# Altium PCB PCB_Ticketing_Slave.PcbDoc
Units mm, origin at the board's own origin, x right, y up, seen from the top; angles counter-clockwise.
Board outline 80.7 x 51.5 mm, 2 copper layers (Top Layer, Bottom Layer), stack 1.586 mm thick; 48 components, 35 nets, 188 pads, 69 vias.
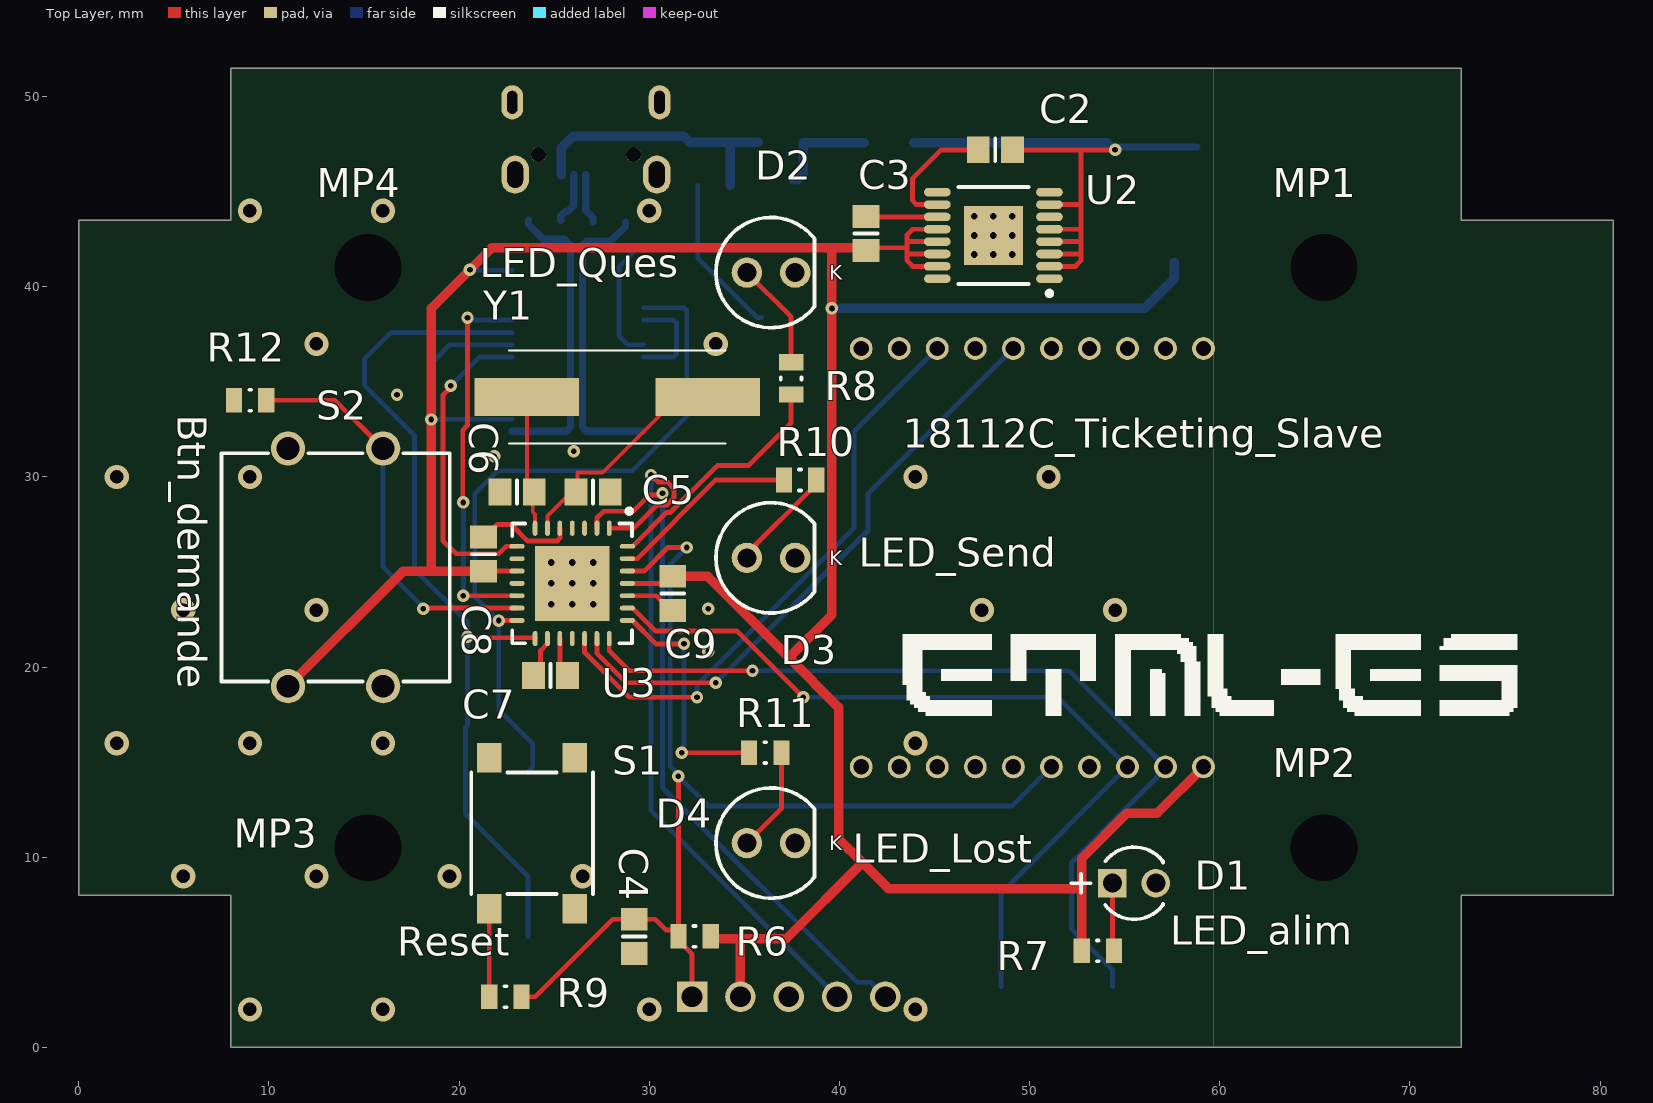
[diagram p0: Top Layer view]
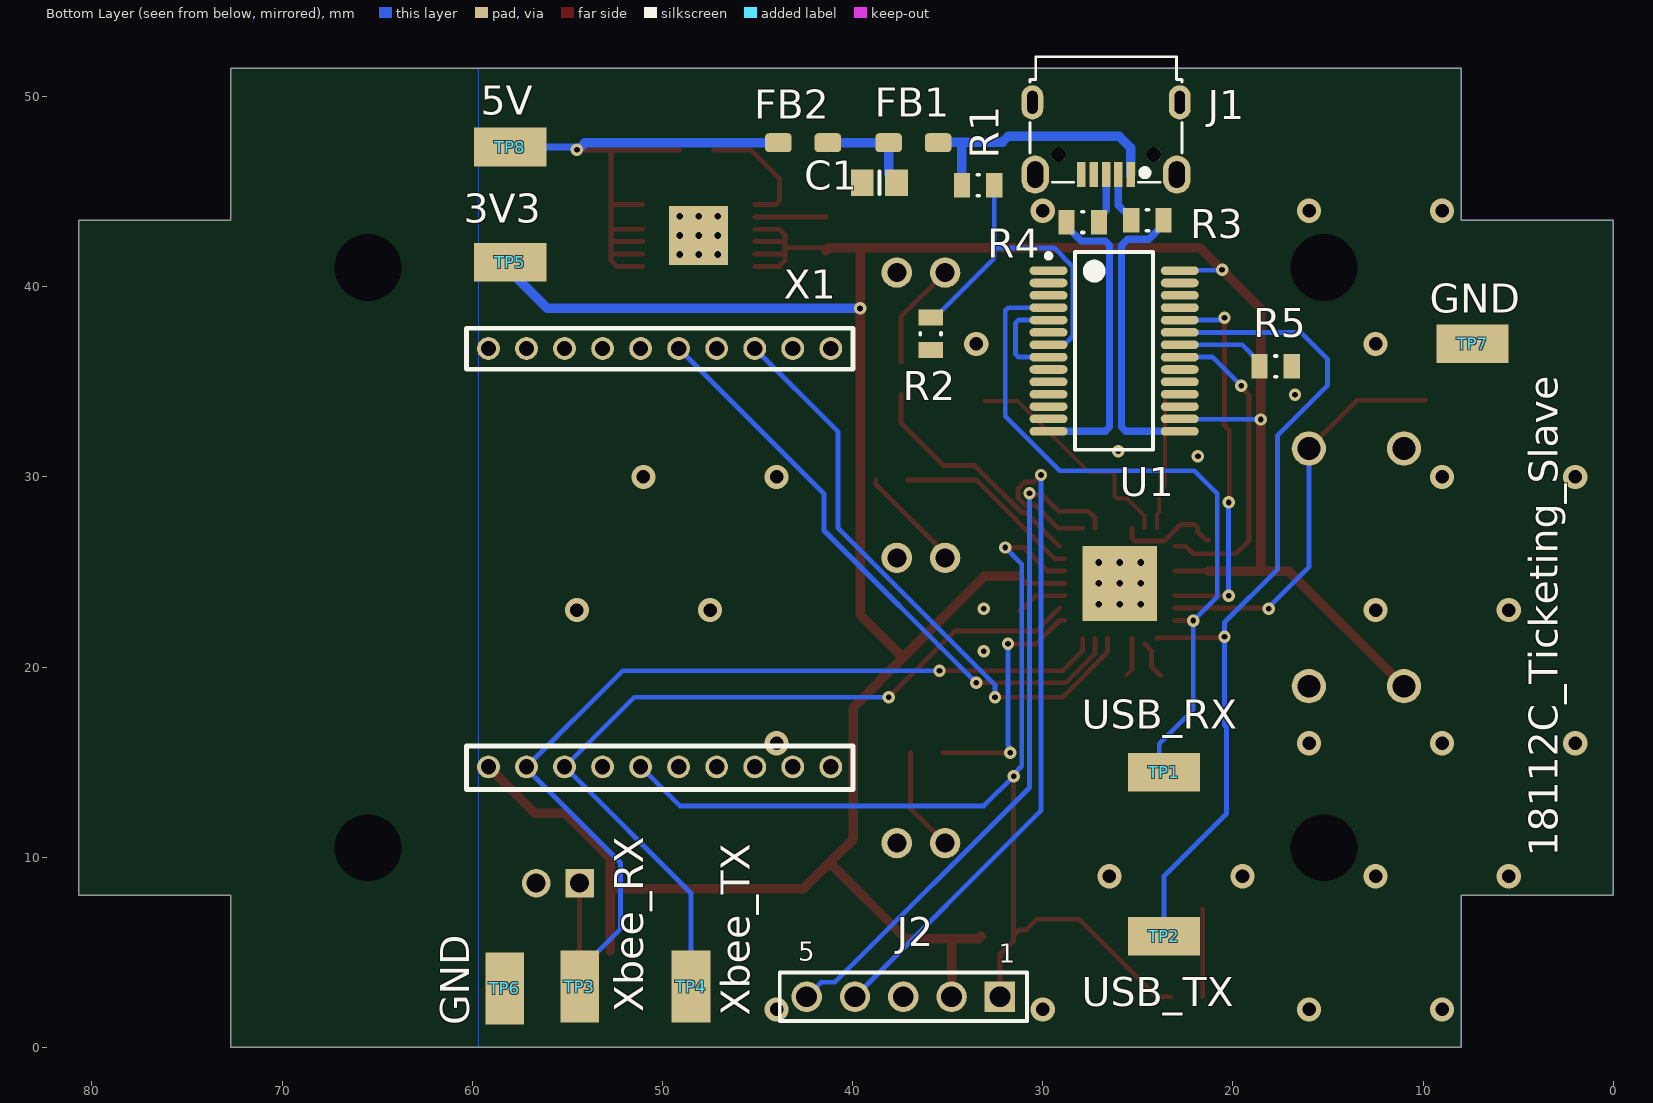
[diagram p1: Bottom Layer view, seen from below]
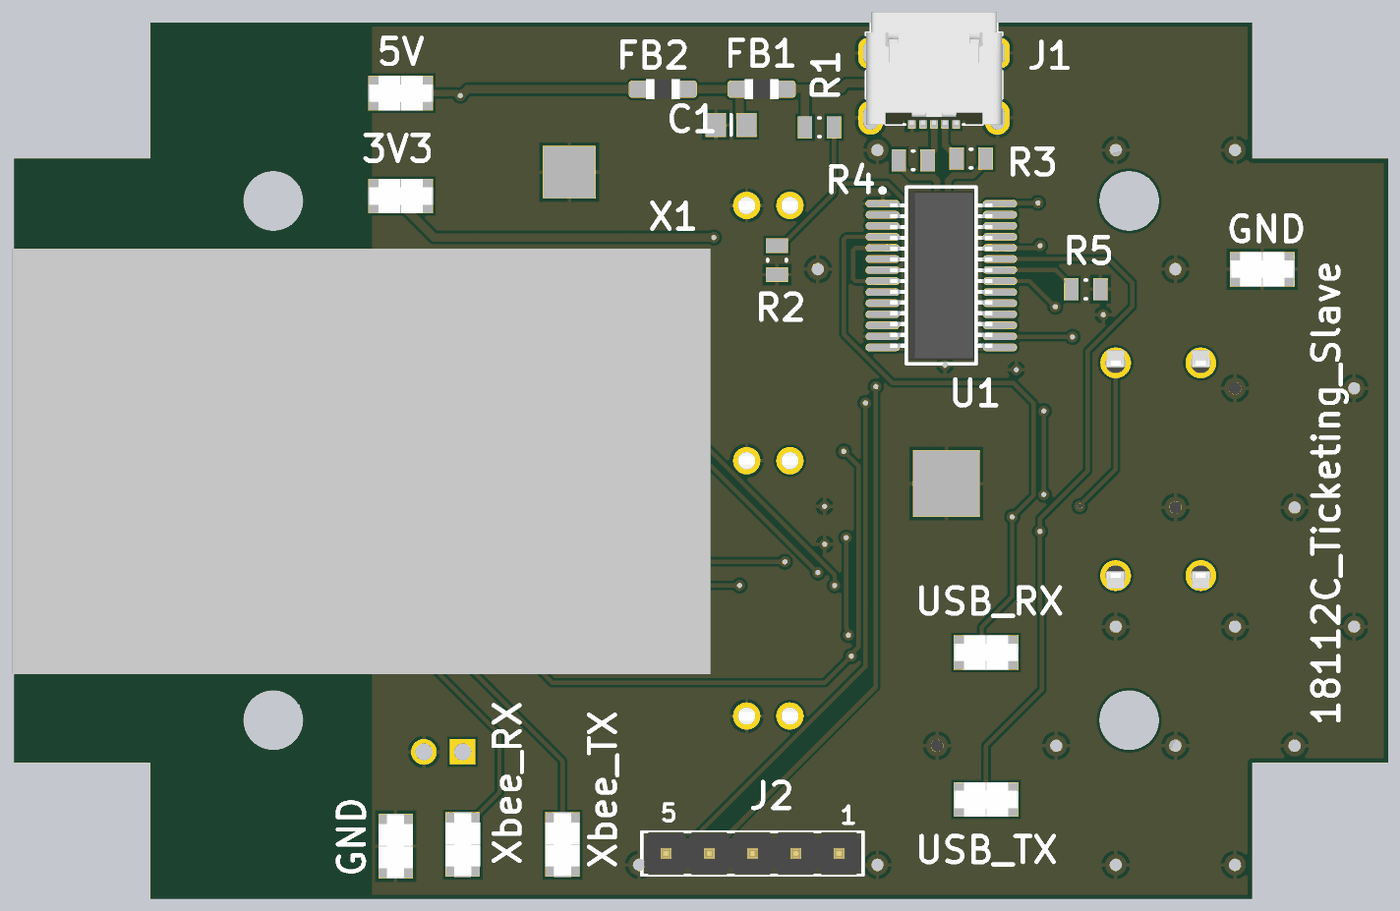
[diagram p2: 3D render of the assembled board from below, using the file's embedded part models]

## Layer stack, top to bottom
Top Solder: solder mask 0.0102, Solder Resist, Dk 3.5
Top Layer: signal copper 0.018
Dielectric1: core 1.55, FR-4, Dk 4.8
Bottom Layer: signal copper 0.018
Bottom Solder: solder mask 0.0102, Solder Resist, Dk 3.5

## Board outline
0,8 0,43.5 8,43.5 8,51.5 72.7,51.5 72.7,43.5 80.7,43.5 80.7,8 72.7,8 72.7,0 8,0 8,8

## Design rules (kind name [scope] priority, off if disabled: settings)
BoardOutlineClearance [All] p1: gap=0.25 ignorepadtopadclearanceinfootprint=FALSE except(0: Arc-SplitContinuation Track-SplitContinuation SMDPad-SplitContinuation THPad-SplitContinuation Via-SplitContinuation Fill-SplitContinuation Poly-SplitContinuation Region-SplitContinuation Text-SplitContinuation)
Clearance Clearance-xPP-xTP-xTT [All] p1: gap=0.15 ignorepadtopadclearanceinfootprint=FALSE except(0: Arc-Hole Track-Hole SMDPad-Hole THPad-Hole Via-Hole Fill-Hole Poly-Hole Region-Hole Text-Hole)
ComponentClearance [All] p1: gap=0.25 collisioncheckmode=3 verticalgap=0.25 showdistances=FALSE
DiffPairsRouting [All] p1: maxlimit=0.25 minlimit=0.25 mostfreqgap=0.25 toplayer_minwidth=0.381 toplayer_maxwidth=0.381 toplayer_prefwidth=0.381 bottomlayer_minwidth=0.381 bottomlayer_maxwidth=0.381 bottomlayer_prefwidth=0.381 maxuncoupledlength=12.5
Height [All] p1: minheight=0 maxheight=25 prefheight=12.5
HoleSize HoleSize-PTH [All] p1: absolutevalues=TRUE maxlimit=10 minlimit=0.25 maxpercent=80.000 minpercent=20.000
HoleToHoleClearance [All] p1: gap=0.35 allowstackedmicrovias=TRUE
MinimumAnnularRing "Minimum IAR  >0.45mm" [((ObjectKind = 'Pad') OR (ObjectKind = 'Via')) And (Layer = 'MultiLayer') And (HoleDiameter > AsMM(0.45))] p1: minimumring=0.175 // minimum inner annular ring for pads > 0.45mm finished hole size
MinimumAnnularRing "Minimum IAR <=0.45mm" [((ObjectKind = 'Pad') OR (ObjectKind = 'Via')) And (Layer = 'MultiLayer') And (HoleDiameter <= AsMM(0.45))] p2: minimumring=0.175 // minimum inner annular ring for pads <= 0.45mm finished hole size
MinimumSolderMaskSliver [All] p1: minsoldermaskwidth=0.08
PasteMaskExpansion [All] p1: expansion=-0.025
PlaneClearance PlaneClearance-IPI [All] p1: clearance=0.25
PlaneConnect [All] p1: planeconnectstyle=Relief reliefexpansion=0.175 reliefentries=4 reliefconductorwidth=0.2 reliefairgap=0.2
PolygonConnect PolygonConnect-xTW [All] p1: connectstyle=Relief reliefconductorwidth=0.2 reliefentries=4 polygonreliefangle="90 Angle" airgapwidth=0.2
RoutingCorners [All] p1: cornerstyle=45-Degree minsetback=2.5 maxsetback=2.5
RoutingVias RoutingViasES [All] p1: holewidth=0.3 width=0.65 viastyle="Through Hole" minholewidth=0.25 minwidth=0.61 maxholewidth=0.45 maxwidth=0.8 // finishet hole size <= 0.45mm
SilkToSilkClearance [All] p1: silktosilkclearance=0.2
SilkToSolderMaskClearance SilkscreenOverComponentPads [IsPad] p1: minsilkscreentomaskgap=0.2 clearancetoexposedcopper=TRUE
SolderMaskExpansion [All] p1: expansion=0 istentingtop=FALSE
UnRoutedNet [All] p1: checkbadconnections=TRUE
Width "Width Power" [InNetClass('POWER')] p1: maxlimit=0.5 minlimit=0.254 preferedwidth=0.5
Width Width-xTW [All] p2: maxlimit=1.5 minlimit=0.15 preferedwidth=0.254
17 further rules are at their usual default settings.

## Classes and differential pairs
net class POWER: 3V3 5V GND NetC1_1 NetR1_2 NetU2_6 VBUS
component class Designator: D1 D2 D3 D4 MP1 MP2 MP3 MP4 R7 R8 R9 R10 R11 R12 S1 S2
differential pair USB_D: +USB_D_P -USB_D_N
differential pair U_D: +U_D_P -U_D_N

## Components (designator, comment, footprint, x,y, rotation, side; value= is the part's Value field where it differs from the comment)
C1 "680nF" 6-0805_N 38.596,45.475 r0 bottom
C2 "10uF" 6-0805_N 48.2,47.2 r180 top
C3 "10uF" 6-0805_N 41.402,42.802 r270 top
C4 "120nF" 6-0805_N 29.21,5.842 r90 top
C5 "22pF" 6-0805_N 27.052,29.21 r180 top
C6 "22pF" 6-0805_N 23.052,29.21 r0 top
C7 "10uF" 6-0805_N 24.811,19.558 r0 top
C8 "100nF" 6-0805_N 21.285,25.937 r270 top
C9 "100nF" 6-0805_N 31.242,23.876 r90 top
D1 "WP424IDT" LED-2P-2.28-3MM 55.499,8.636 r0 top
D2 "WP7113LGD" "Type 5mm" 36.41,40.746 r0 top locked
D3 "WP7113ND" "Type 5mm" 36.41,25.746 r0 top locked
D4 "WP7113LID" "Type 5mm" 36.41,10.746 r0 top locked
FB1 "600Ohm, 2A" "WE-CBF_0805_High Current" 36.805,47.575 r0 bottom
FB2 "600Ohm, 2A" "WE-CBF_0805_High Current" 42.605,47.575 r0 bottom
J1 "629105150521" 629105150521 26.675,48.8 r0 bottom
J2 "2.54 mm_THT_Vertical_5 pin" 61300511121 37.338,2.667 r0 bottom
MP1 "M3" 9774010151 65.485,41.01 r0 top
MP2 "M3" 9774010151 65.485,10.5 r0 top
MP3 "M3" 9774010151 15.215,10.5 r0 top
MP4 "M3" 9774010151 15.215,41.01 r0 top
R1 "10k" RESC0805(2012)_L 33.401,45.339 r180 bottom
R2 "20k" RESC0805(2012)_L 35.9,37.527 r270 bottom
R3 "24R" RESC0805(2012)_L 24.5,43.5 r180 bottom
R4 "24R" RESC0805(2012)_L 27.9,43.4 r0 bottom
R5 "1k" RESC0805(2012)_L 17.757,35.814 r180 bottom
R6 "47k" RESC0805(2012)_L 32.385,5.842 r180 top
R7 "68" RESC0805(2012)_L 53.594,5.08 r180 top
R8 "75" RESC0805(2012)_L 37.465,35.179 r270 top
R9 "120" RESC0805(2012)_L 22.44,2.667 r0 top value=10k
R10 "68" RESC0805(2012)_L 37.934,29.845 r180 top value=680
R11 "820" RESC0805(2012)_L 36.1,15.5 r180 top value=680
R12 "10k" RESC0805(2012)_L 9.017,34.036 r180 top
S1 "430182050816" 430182050816 23.84,11.265 r270 top
S2 "430466073726" 4304x60737x6_12x12x7.3 13.51,25.246 r90 top locked
TP1 "" KSTN-5019_V 23.622,14.478 r180 bottom
TP2 "" KSTN-5019_V 23.622,5.842 r180 bottom
TP3 "" KSTN-5019_V 54.359,3.2 r270 bottom value=Xbee_RX
TP4 "" KSTN-5019_V 48.5,3.2 r270 bottom value=Xbee_TX
TP5 "" KSTN-5019_V 58,41.3 r0 bottom
TP6 "" KSTN-5019_V 58.3,3.1 r270 bottom
TP7 "" KSTN-5019_V 7.4,37 r0 bottom
TP8 "" KSTN-5019_V 58,47.35 r0 bottom
U1 "CY7C64225-28PVXC" CYP-PVX28_N 26.25,36.625 r180 bottom
U2 "MAX1793EUE33+" TSOP65P640X110_HS-17N 48.1,42.7 r180 top
U3 "PIC32MX130F064B-I/ML" MCHP-QFN-ML28_L 25.952,24.402 r270 top
X1 "Header 2x10" ZB-SB 50.15,25.755 r90 bottom locked
Y1 "LFXTAL003151" LFXTAL003151REEL 28.321,34.2 r180 top

## Footprints (in the part's own frame and the unit in brackets; to place one, negate y for a bottom-side part, rotate by r counter-clockwise, add the part's x,y. Pads: shape width x height; smd on the part's side, far side on the other; paste and mask are expansions set on the pad)
6-0805_N [mm] "Chip Resistor, Body 2.0x1.2mm, IPC Medium Density"
  rect 1.2x1.4 smd: 1(-0.9,0) 2(0.9,0)
  silkscreen extent 0,-0.6 0,0.6, body extent -1.07,-0.7 1.07,0.7, height 0.7
4304x60737x6_12x12x7.3 [mm] "12x12mm washable Tact Switch, THT version"
  round 1.8 hole 1.2: 1(-6.25,2.5) 2(6.25,2.5) 3(-6.25,-2.5) 4(6.25,-2.5)
  silkscreen extent -6,-6 6,6, body extent -6.99,-6 6.99,6, height 7.35
9774010151 [mm] "M2.5 Thread Internal, Length 1mm"
  round 0 hole 3.51 unplated paste-403.566: 1(0,0)
61300511121 [mm] "Pin Header, pitch 2.54 mm, THT, Vertical, single row, 5p"
  rect 1.6x1.6 hole 1.1: 1(-5.08,0)
  round 1.6 hole 1.1: 2(-2.54,0) 3(0,0) 4(2.54,0) 5(5.08,0)
  silkscreen extent -6.5,-1.27 6.5,1.27, body extent -6.35,-1.27 6.35,1.27, height 8.57
430182050816 [mm] "SMD Tact Switch, body 6x6mm"
  rect 1.55x1.3 smd: 1(-3.975,2.25) 2(-3.975,-2.25) 3(3.975,2.25) 4(3.975,-2.25)
  silkscreen extent -3.2,-3.2 3.2,3.2, body extent -4.5,-3.1 4.5,3.1, height 5.03
629105150521 [mm] "Micro USB 2.0 SMT Type B Horizontal 5 Contacts High Current"
  rect 0.45x1.3 smd: 1(-1.3,2.9) 2(-0.65,2.9) 3(0,2.9) 4(0.65,2.9) 5(1.3,2.9)
  oval 1.15x1.8 hole 0.55 slot 1.2 at 90 deg: Shell(-3.875,-0.9) Shell(3.875,-0.9)
  oval 1.45x2 hole 0.85 slot 1.4 at 90 deg: Shell(-3.725,2.9) Shell(3.725,2.9)
  round 0.8 hole 0.8 unplated: ""(-2.5,1.85) ""(2.5,1.85)
  silkscreen extent -4,-3.3 4,3.3, body extent -4,-3.3 4,3.3, height 2.71
CYP-PVX28_N [mm] "SOP, 28-Leads, Body 10.2x5.3mm, Pitch 0.65mm, IPC Medium Density"
  oval 2x0.45 smd: 1(-3.45,4.225) 2(-3.45,3.575) 3(-3.45,2.925) 4(-3.45,2.275) 5(-3.45,1.625) 6(-3.45,0.975) 7(-3.45,0.325) 8(-3.45,-0.325) 9(-3.45,-0.975) 10(-3.45,-1.625) 11(-3.45,-2.275) 12(-3.45,-2.925) 13(-3.45,-3.575) 14(-3.45,-4.225) 15(3.45,-4.225) 16(3.45,-3.575) 17(3.45,-2.925) 18(3.45,-2.275) 19(3.45,-1.625) 20(3.45,-0.975) 21(3.45,-0.325) 22(3.45,0.325) 23(3.45,0.975) 24(3.45,1.625) 25(3.45,2.275) 26(3.45,2.925) 27(3.45,3.575) 28(3.45,4.225)
  silkscreen extent -3.58,-5.2 2.05,5.2, body extent -3,-4.95 3,4.95, height 1.75
KSTN-5019_V [mm] "Test Point, 1-Leads, Body 3.81x2.03mm"
  rect 3.8x2.03 smd: 1(0,0)
  body extent -1.91,-1.02 1.9,1.02, height 2.29
LED-2P-2.28-3MM [mm] "LED, 2-Leads, Dia 3mm, Pitch 2.28mm"
  rect 1.5x1.5 hole 1: 1(-1.14,0)
  round 1.5 hole 1: 2(1.14,0)
  silkscreen extent -3.29,-1.9 1.52,1.9, body extent -1.9,-1.91 1.52,1.91, height 5.3
LFXTAL003151REEL [mm]
  rect 5.5x2 smd: 1(-4.75,0) 2(4.75,0)
  silkscreen extent -5.7,-2.45 5.7,2.45, body extent -5.81,-2.35 5.8,2.35, height 4.2
MCHP-QFN-ML28_L [mm] "QFN, 28-Leads, Body 6x6mm, Pitch 0.65mm, Thermal Pad 3.7x3.7mm, IPC High Density"
  oval 0.8x0.25 smd: 1(-2.9,1.95) 2(-2.9,1.3) 3(-2.9,0.65) 4(-2.9,0) 5(-2.9,-0.65) 6(-2.9,-1.3) 7(-2.9,-1.95) 15(2.9,-1.95) 16(2.9,-1.3) 17(2.9,-0.65) 18(2.9,0) 19(2.9,0.65) 20(2.9,1.3) 21(2.9,1.95)
  oval 0.25x0.8 smd: 8(-1.95,-2.9) 9(-1.3,-2.9) 10(-0.65,-2.9) 11(0,-2.9) 12(0.65,-2.9) 13(1.3,-2.9) 14(1.95,-2.9) 22(1.95,2.9) 23(1.3,2.9) 24(0.65,2.9) 25(0,2.9) 26(-0.65,2.9) 27(-1.3,2.9) 28(-1.95,2.9)
  rect 3.93x3.93 smd: 29(0,0)
  rect 3.93x3.93 smd far side: 29(0,0)
  silkscreen extent -3.92,-3.15 3.15,3.15, body extent -3,-3 3,3, height 1
RESC0805(2012)_L [mm] "Chip Resistor, Body 2.0x1.3mm, IPC High Density"
  rect 0.85x1.3 smd: 1(-0.85,0) 2(0.85,0)
  silkscreen extent -0.05,-0.55 0.05,0.55, body extent -1.1,-0.67 1.1,0.68, height 0.7
TSOP65P640X110_HS-17N [mm] "TSOP, 16-Leads, Body 5.00x4.40mm, Pitch 0.65mm, Thermal Pad 3.10x3.10mm, IPC Medium Density"
  oval 1.4x0.45 smd: 1(-2.95,2.275) 2(-2.95,1.625) 3(-2.95,0.975) 4(-2.95,0.325) 5(-2.95,-0.325) 6(-2.95,-0.975) 7(-2.95,-1.625) 8(-2.95,-2.275) 9(2.95,-2.275) 10(2.95,-1.625) 11(2.95,-0.975) 12(2.95,-0.325) 13(2.95,0.325) 14(2.95,0.975) 15(2.95,1.625) 16(2.95,2.275)
  rect 3.1x3.1 smd: 17(0,0)
  rect 3.1x3.1 smd far side: 17(0,0)
  silkscreen extent -3.08,-2.55 1.85,3.17, body extent -3.19,-2.55 3.19,2.55, height 1.1
"Type 5mm" [mm] "THT, LED-5mm, 2pin- Body 5.8mm"
  round 1.6 hole 1: 1(1.27,0) 2(-1.27,0)
  silkscreen extent -2.9,-2.9 2.29,2.9, body extent -2.9,-2.9 2.5,2.9, height 11.7
"WE-CBF_0805_High Current" [mm]
  rrect40% 1.4x1 smd: 1(-1.3,0) 2(1.3,0)
  body extent -1,-0.6 1,0.6, height 0.9
ZB-SB [mm] "Header"
  round 1.2 hole 0.8: 1(-11,9) 2(-11,7) 3(-11,5) 4(-11,3) 5(-11,1) 6(-11,-1) 7(-11,-3) 8(-11,-5) 9(-11,-7) 10(-11,-9) 11(11,9) 12(11,7) 13(11,5) 14(11,3) 15(11,1) 16(11,-1) 17(11,-3) 18(11,-5) 19(11,-7) 20(11,-9)
  silkscreen extent -12.19,-10.16 12.06,10.16, body extent -12.55,-10.34 12.45,30.66, height 7.5

## Part data
C1: library part 885012207098, "WCAP-CSGP General Purpose Ceramic Capacitors, size 0805, 100nF, +/-10%, 50VDC", Supplier Part Number=732-7663-1-ND, Capacitance=680nF, Supplier=Digi-Key, Supplier Part Number 1=732-7663-1-ND, Supplier unit price=0.13, Technical Reference=X7R0805104K050DFCT10000
C2 C3 C7: library part Cap, "Capacitor", Supplier Part Number=1276-1298-1-ND, Supplier=Digi-Key, Supplier unit price=0.1
  C2 C3: Capacitance=10uF, LatestRevisionDate=17-Jul-2002, LatestRevisionNote="Re-released for DXP Platform.", PackageDescription="Radial Cap, Thru-Hole; 2 Leads; 0.3 in Pin Spacing", PackageReference=RAD-0.3, Published=8-Jun-2000, Publisher="Altium Limited"
C4: library part Cap, "Capacitor", Supplier Part Number=311-4323-1-ND, Supplier=Digi-Key, Supplier unit price=0.18
C5 C6: library part CMP-2007-03167-1, "VJ0805Y104KNAAT", Supplier Part Number=399-C0805C220J5GAC7800CT-ND, Supplier=Digi-Key, Supplier unit price=0.1
C8 C9: library part Cap, "Capacitor", Supplier Part Number=399-C0805C104M5RAC7800CT-ND, Supplier=Digi-Key, Supplier unit price=0.1
D1: library part LED, "LED", Color=Red, Supplier Part Number=754-1305-ND, Supplier=Digi-Key, Supplier unit price=0.4
D2: library part LED, "LED", Color=Green, Supplier Part Number=754-1265-ND, Supplier=Digi-Key, Supplier unit price=0.33
D3: library part LED, "LED", Color=Orange, Supplier Part Number=754-1896-ND, Supplier=Digi-Key, Supplier unit price=0.3
D4: library part LED, "LED", Color=Red, Supplier Part Number=754-1266-ND, Supplier=Digi-Key, Supplier unit price=0.33
FB1 FB2: library part 742792040, "WE-CBF SMT EMI Suppression Ferrite Bead, size 0805, 600Ohm, 2A", DC Resistance max.=0.15Ohm, Operating Temperature="-55 to +125degC", Rated Current=2A, Supplier Part Number=732-1620-1-ND, ComponentLink1Description=Manufacturer, ComponentLink1URL=http://www.we-online.de, ComponentLink2Description=Datasheet, ComponentLink2URL=https://katalog.we-online.com/pbs/datasheet/742792040.pdf, Impedance max.=700Ohm, Impedance@100 MHz=600Ohm, Mounting Technology=SMT, Packaging="Tape and Reel", Part Number=742792040, Published Date="March 2019", Publisher="Wurth Elektronik", Size=0805, Supplier=Digi-Key, Supplier Part Number 1=732-1620-1-ND, Supplier unit price=0.22, Type="High Current"
J1: "Micro USB 2.0 SMT Type B Horizontal 5 Contacts High Current WR-COM", Part Number=732-5960-1-ND, ComponentLink1Description=Manufacturer, ComponentLink1URL=http://www.we-online.de, ComponentLink2Description=Datasheet, ComponentLink2URL=http://katalog.we-online.de/em/datasheet/629105150521.pdf, Construction=SMT, Gender=Receptacle, Interface Type="Type B", Published Date="April 2017", Publisher="Wurth Elektronik", Sub-Family="Micro USB 2.0", Supplier=Digi-key, Supplier Part Number=732-5960-1-ND, Supplier unit price=2.12, Type=Horizontal
J2: library part 61300511121, "Pin Header WR-PHD, pitch 2.54 mm, THT, Vertical, single row, 5 pin", Supplier Part Number=732-5318-ND, Supplier=Digi-Key, Supplier unit price=0.25
MP1 MP2 MP3 MP4: library part 9774010151, "WA-SMSI SMT Steel Spacer, M2.5 Thread Internal, Length 1mm", Supplier=Digi-Key
R1: library part CMP-1013-00122-1, "100K 0.125W 5% 0805 (2012 Metric)  SMD", Case-EIA=0805, Case-Metric=2012, Power="0.125 W", Supplier Part Number=311-10KLGCT-ND, Tolerance="5 %", Supplier=Digi-Key, Supplier unit price=0.1, Technology=SMT
R2: library part CMP-1013-00122-1, "100K 0.125W 5% 0805 (2012 Metric)  SMD", Case-EIA=0805, Case-Metric=2012, Power="0.125 W", Supplier Part Number=RNCP0805FTD20K0CT-ND, Tolerance="5 %", Supplier=Digi-Key, Supplier unit price=0.1, Technology=SMT
R3 R4: library part CMP-1013-00122-1, "100K 0.125W 5% 0805 (2012 Metric)  SMD", Case-EIA=0805, Case-Metric=2012, Power="0.125 W", Supplier Part Number=311-24.0CRCT-ND, Tolerance="5 %", Supplier=Digi-Key, Supplier unit price=0.1, Technology=SMT
R5: library part CMP-1013-00122-1, "100K 0.125W 5% 0805 (2012 Metric)  SMD", Case-EIA=0805, Case-Metric=2012, Power="0.125 W", Supplier Part Number=RNCP0805FTD1K00CT-ND, Tolerance="5 %", Supplier=Digi-Key, Supplier unit price=0.1, Technology=SMT
R6: library part CMP-1013-00122-1, "100K 0.125W 5% 0805 (2012 Metric)  SMD", Supplier Part Number=A130144CT-ND, Supplier=Digi-Key, Supplier unit price=0.1
R7 R10: library part CMP-1013-00122-1, "100K 0.125W 5% 0805 (2012 Metric)  SMD", Supplier Part Number=RMCF0805JT68R0CT-ND, Supplier=Digi-Key, Supplier unit price=0.1
R8: library part CMP-1013-00122-1, "100K 0.125W 5% 0805 (2012 Metric)  SMD", Supplier Part Number=A126386CT-ND, Supplier=Digi-Key, Supplier unit price=0.1
R9: library part CMP-1013-00122-1, "100K 0.125W 5% 0805 (2012 Metric)  SMD", Supplier Part Number=A129738CT-ND, Supplier=Digi-Key, Supplier unit price=0.1
R11: library part CMP-1013-00122-1, "100K 0.125W 5% 0805 (2012 Metric)  SMD", Supplier Part Number=A129748CT-ND, Supplier=Digi-Key, Supplier unit price=0.1
R12: library part CMP-1013-00122-1, "100K 0.125W 5% 0805 (2012 Metric)  SMD", Supplier Part Number=311-10KLGCT-ND, Supplier=Digi-Key, Supplier unit price=0.1
S1: "6x6mm SMD Tact Switch WS-TASV, height 5 mm, 160 gf", Supplier Part Number=732-7005-1-ND, Supplier=Digi-Key, Supplier unit price=0.51
S2: "WS-TATV 12x12mm washable Tact Switch, THT version", Supplier Part Number=430466073726-ND, Supplier=Digi-Key, Supplier unit price=0.56
TP1 TP2 TP5 TP6 TP7 TP8: library part CMP-1672-00008-1, "Test Point, 1 Position SMD, RoHS, Tape and Reel", Package Quantity=1000, Supplier Part Number=36-5019CT-ND, ComponentLink1Description="Manufacturer URL", ComponentLink1URL=http://www.keyelco.com/, ComponentLink2Description=Datasheet, ComponentLink2URL=http://www.keyelco.com/product-pdf.cfm?p=1357, Contact Plating=Silver, DatasheetVersion=03/2014, Mount="Surface Mount", Mounting Technology="Surface Mount", PackageDescription="1-Pin Surface Mount Device, Body 3.81 x 2.03 mm", PackageReference=5019, Packaging="Tape and Reel", Pins=1, RoHSCompliant=True, Supplier=Digi-Key, Supplier unit price=0.33
TP3 TP4: library part CMP-1672-00008-1, "Test Point, 1 Position SMD, RoHS, Tape and Reel", Supplier Part Number=36-5019CT-ND, Supplier=Digi-Key, Supplier unit price=0.33
U1: library part CMP-0967-00143-1, "USB-to-UART Bridge Controller, 3 to 5.25 V, 0 to 70 degC, 28-Pin SSOP (PVX28), Tube", Manufacturer=Cypress, Max. Operating Temp. (degreesC)=70, Max. Operating Voltage (V)=5.25, Min. Operating Temp. (degreesC)=0, Min. Operating Voltage (V)=3, Part Number=428-3158-ND, ComponentLink1Description="Manufacturer URL", ComponentLink1URL=http://www.cypress.com/, ComponentLink2Description=Datasheet, ComponentLink2URL=http://www.cypress.com/?docID=48153, ComponentLink3Description="Package Specification", ComponentLink3URL=http://www.cypress.com/?docID=1371, DatasheetVersion="Rev. *D", Manufacturer Part Number=CY7C64225-28PVXC, Memory Architecture=Flash, Mounting Technology="Surface Mount", PackageDescription="28-Pin Super Small Outline Package, Body 10.2 x 5.3 mm, Pitch 0.65 mm", PackageReference=PVX28, PackageVersion="Rev. *C, 10/2001", Packing=Tube, PartNumber=CY7C64225-28PVXC, RoHS=Pb-Free, Supplier=Digi-key, Supplier Part Number=428-3158-ND, Supplier unit price=3.83
U2: library part MAX1793, Supplier Part Number=MAX1793EUE33+-ND, Supplier=Digi-Key, Supplier unit price=3.92
U3: library part CMP-0048-00437-1, "32-bit Microcontroller with Audio and Graphics Interface, USB and Advanced Analog, 40 MHz, 21 I/O, PMP, -40 to 85 degC, 28-pin QFN (ML28), Tube", Supplier=Digi-Key, Supplier Part Number=PIC32MX130F064B-I/ML, Supplier unit price=3.61
X1: library part "HDR ZB-SB 2x10_1", "Header 2x10 / Xbee de letml(1623) ou xbee XB24CAUIT-001", Supplier=Digi-Key
Y1: library part LFXTAL003151REEL, "Crystal or Oscillator", Frequency=8MHz, Supplier Part Number=9713794, Supplier=Farnell, Supplier unit price=0.392

## Via types
v1: diameter 0.65, hole 0.3, Top Layer to Bottom Layer, tented both sides, 26 vias
v2: diameter 1.27, hole 0.711, Top Layer to Bottom Layer, tented both sides, 25 vias
v3: diameter 0.75, hole 0.35, Top Layer to Bottom Layer, 18 vias

## Nets (pads, with @x,y where several pads share a name; then routed paths per layer and width w, separated by ;. In a path a pad name is that pad's centre, name@x,y a point inside that pad or via, vN(x,y) a via of type N, cw(c..) or ccw(c..) an arc to the next point about the centre after c; other vN are vias at no path point)
3V3: C3.2 C8.2 C9.2 J2.2 R6.1 R7.2 S2.1 TP5.1 U1.16 U1.28 U2.12 U2.13 U2.14 U2.15 U3.10 U3.25 X1.1 | length 172.2
  Top Layer w0.254: C8.2@21.285,25.187 21.42,25.052 U3.10 ; U3.25 30.868,24.402 C9.2 ; C3.2@41.402,42.052 43.503,42.052 ; U2.15 43.854,41.075 43.561,41.368 43.561,41.725 ; U2.14 43.561,41.725 ; U2.13 43.673,42.375 43.561,42.263 ; U2.12 43.854,43.025 43.561,42.732 43.561,42.263 ; 43.561,41.725 43.561,42.052 43.561,42.263
  Top Layer w0.5: S2.1 17.051,25.037 18.542,25.037 ; C8.2 18.542,25.037 ; C9.2 33.071,24.776 37.35,20.497 ; R6.1 33.362,5.715 34.798,5.715 ; J2.2 34.798,5.715 ; C3.2 41.252,42.052 39.609,42.052 ; R7.2 52.744,8.349 ; X1.1 56.714,12.319 55.118,12.319 52.744,9.945 52.744,8.349 ; 18.542,25.037 v1(18.542,33.02) 18.542,38.862 v1(20.574,40.894) 21.732,42.052 39.609,42.052 ; 34.798,5.715 37.21,5.715 41.212,9.717 ; 37.35,20.497 39.609,22.756 v1(39.609,38.862) 39.609,42.052 ; 37.35,20.497 39.965,17.882 39.965,10.964 41.212,9.717 ; 41.212,9.717 42.58,8.349 52.744,8.349
  Bottom Layer w0.254: v1(18.542,33.02) 18.557,33.035 22.785,33.035 U1.16 ; v1(20.574,40.894) 20.596,40.872 22.778,40.872 U1.28
  Bottom Layer w0.5: v1(39.609,38.862) 56.047,38.862 57.6,40.415 TP5.1@57.6,41.3
5V: C2.1 FB2.2 TP8.1 U2.2 U2.3 U2.4 U2.5 U2.7 | length 34.7
  Top Layer w0.254: C2.1 52.7,47.2 ; U2.2 52.412,41.075 52.705,41.368 52.705,41.725 ; U2.3 52.705,41.725 ; U2.4 52.705,42.375 ; U2.5 52.705,43.025 ; U2.7 52.7,44.325 ; v1(54.5,47.2) 52.7,47.2 ; 52.7,47.2 52.7,43.79 52.705,43.785 52.705,43.025 ; 52.705,41.725 52.705,42.375 ; 52.705,42.375 52.705,43.025
  Bottom Layer w0.381: v1(54.5,47.2) 54.573,47.2 54.723,47.35 TP8.1 TP8.1@58.8,47.35
  Bottom Layer w0.5: FB2.2 54.084,47.575 54.459,47.2 v1(54.5,47.2)
Connect(M): U3.19 X1.18 | length 31.2
  Top Layer w0.254: U3.19 26.602,20.769 28.956,18.415 v1(32.512,18.415)
  Bottom Layer w0.254: v1(32.512,18.415) 32.512,19.055 40.766,27.309 40.766,32.371 X1.18
GND: C1.2 C2.2 C3.1 C4.1 C5.1 C6.1 C7.1 C8.1 C9.1 D1.2 D2.1 D3.1 D4.1 J1.5 J1.Shell J2.3 R2.2 R5.2 R12.2 S1.1 TP6.1 TP7.1 U1.1 U1.13 U2.10 U2.11 U2.17 U3.5 U3.16 U3.24 U3.29 X1.10 | length 20.7
  Top Layer w0.254: C8.1@21.285,26.687 21.435,26.687 21.858,27.11 21.858,27.351 22.007,27.5 22.748,27.5 23.623,26.625 25.154,26.625 25.302,26.774 U3.5 ; v1@21.844,30.988 v1(21.844,31.091) ; C7.1@23.814,19.558 24.287,20.031 24.287,20.866 U3.16@24.65,21.229 ; U3.24 30.366,23.752 31.142,22.976 C9.1 ; C3.1 41.429,43.675 U2.11 ; U2.10 44.056,44.325 43.854,44.527 43.854,45.7 45.354,47.2 C2.2
  other v1: 33.099,20.84 33.111,23.062 26.035,31.358 16.737,34.323
  other v2: 9,2 16,2 30,2 44,2 5.5,9 12.5,9 19.5,9 26.5,9 2,16 9,16 16,16 44,16 5.5,23 12.5,23 47.5,23 54.5,23 2,30 9,30 44,30 51,30 12.5,37 33.5,37 9,44 16,44 30,44
  other v3: 24.852,23.302 25.952,23.302 27.052,23.302 24.852,24.402 25.952,24.402 27.052,24.402 24.852,25.502 25.952,25.502 27.052,25.502 47.1,41.7 48.1,41.7 49.1,41.7 47.1,42.7 48.1,42.7 49.1,42.7 47.1,43.7 48.1,43.7 49.1,43.7
LED_Lost: R11.2 U3.22 | length 12.8
  Top Layer w0.254: U3.22 29.123,22.452 30.367,21.209 31.813,21.209 v1(31.833,21.229) ; v1(31.707,15.5) R11.2
  Bottom Layer w0.254: v1(31.707,15.5) 31.783,15.576 31.783,15.855 31.833,15.905 v1(31.833,21.229)
LED_Ques: R8.2 U3.28 | length 12.5
  Top Layer w0.254: U3.28@29.125,26.354 30.9,28.129 31.118,28.129 33.596,30.607 35.226,30.607 37.465,32.846 R8.2
LED_Send: R10.2 U3.27 | length 9.9
  Top Layer w0.254: U3.27 29.364,25.702 33.507,29.845 R10.2
LINK(M): U3.20 X1.16 | length 31.7
  Top Layer w0.254: U3.20 27.252,20.721 28.797,19.177 v1(33.5,19.177)
  Bottom Layer w0.254: v1(33.5,19.177) 41.506,27.183 41.506,29.111 X1.16
NetC1_1: C1.1 FB1.2 FB2.1 | length 5.5
  Bottom Layer w0.5: C1.1@37.605,45.625 37.805,45.625 38.105,45.925 FB1.2 FB2.1
NetC5_2: C5.2 U3.6 Y1.1 | length 12.3
  Top Layer w0.2: U3.6 24.652,27.95 24.858,28.155 25.57,28.867 26.109,28.867 26.227,28.985 26.227,30.235 27.556,30.235 31.321,34 Y1.1@33.071,34
NetC6_2: C6.2 U3.7 Y1.2 | length 6.9
  Top Layer w0.2: Y1.2@23.571,34 23.571,33.147 23.571,29.516 23.877,29.21 23.877,28.155 24.003,28.03 U3.7
NetC7_2: C7.2 U3.17 | length 2.1
  Top Layer w0.2: C7.2@25.302,19.87 C7.2@25.614,19.558
  Top Layer w0.254: C7.2@25.302,19.87 U3.17
NetD1_1: D1.1 R7.1 | length 3.6
  Top Layer w0.254: D1.1 54.359,5.165 R7.1
NetD2_2: D2.2 R8.1 | length 5.7
  Top Layer w0.254: D2.2 37.465,38.421 R8.1
NetD3_2: D3.2 R10.1 | length 5.6
  Top Layer w0.254: D3.2 35.14,25.976 38.784,29.62 R10.1
NetD4_2: D4.2 R11.1 | length 5.5
  Top Layer w0.254: D4.2 36.95,12.556 R11.1
NetR1_2: R1.2 R2.1 U1.7 | length 18.1
  Bottom Layer w0.254: U1.7 28.872,36.95 28.724,37.098 28.717,37.098 28.416,37.399 28.416,41.051 29.408,42.043 32.551,42.043 ; R1.2 32.551,42.043 ; R2.1 35.675,38.377 32.551,41.502 32.551,42.043
NetR5_1: R5.1 U1.22 | length 4.8
  Bottom Layer w0.254: R5.1 18.607,36.039 19.518,36.95 U1.22
NetR9_1: R9.1 S1.4 | length 4.6
  Top Layer w0.254: R9.1 S1.4
NetR12_1: R12.1 S2.4 U3.13 | length 21.5
  Top Layer w0.254: R12.1 13.47,34.036 S2.4 ; v1(18.123,23.062) 18.161,23.1 20.828,23.1 20.83,23.102 U3.13
  Bottom Layer w0.254: S2.4 16.01,25.251 18.123,23.138 v1(18.123,23.062)
NetU1_5: U1.5 U1.8 | length 5.2
  Bottom Layer w0.254: U1.8 31.281,36.3 31.429,36.449 31.429,38.101 31.281,38.25 U1.5
PGEC1: J2.5 U3.2 | length 36.3
  Top Layer w0.254: U3.2 27.252,27.842 27.605,28.194 29.158,28.194 30.023,29.059 30.625,29.059 v1(30.701,29.135)
  Bottom Layer w0.254: v1(30.701,29.135) 30.701,13.662 40.934,3.429 41.656,3.429 J2.5
PGED1: J2.4 U3.1 | length 37.5
  Top Layer w0.254: U3.1@27.904,27.302 29.193,27.302 30.424,28.533 30.95,28.533 31.303,28.886 31.303,29.384 30.95,29.737 30.461,29.737 v1(30.099,30.099)
  Bottom Layer w0.254: v1(30.099,30.099) 30.099,12.446 J2.4
Reset: C4.2 J2.1 R6.2 R9.2 U3.26 X1.5 | length 59.4
  Top Layer w0.254: R9.2 24.003,2.667 28.078,6.742 C4.2 ; U3.26 29.751,25.052 30.988,26.289 v1(31.975,26.289) ; C4.2@29.31,6.742 30.319,6.742 30.878,6.184 31.237,6.184 31.535,5.886 R6.2 ; v1(31.535,14.264) R6.2 ; J2.1 32.258,4.894 31.535,5.617 R6.2
  Bottom Layer w0.254: v1(31.975,26.289) 31.105,25.419 31.105,14.801 31.535,14.371 v1(31.535,14.264) 33.099,12.7 49.095,12.7 49.784,13.389 X1.5
U_D_N: J1.2 R3.1 | length 2.8
  Bottom Layer w0.381: R3.1 25.35,43.725 25.584,43.96 25.711,43.96 26.035,44.283 26.035,45.89 J1.2
U_D_P: J1.3 R4.1 | length 2.7
  Bottom Layer w0.381: J1.3 26.666,45.891 26.666,44.01 27.05,43.625 R4.1
USB_CTS: U1.24 U3.12 | length 20
  Top Layer w0.254: v1(20.228,23.752) U3.12 ; v1(20.228,28.66) 20.193,28.695 20.193,32.454 20.447,32.707 v1(20.447,38.377)
  Bottom Layer w0.254: v1(20.228,23.752) v1(20.228,28.66) ; v1(20.447,38.377) 20.574,38.25 U1.24
USB_D_N: R3.2 U1.15 | length 15.6
  Bottom Layer w0.381: U1.15 25.641,32.4 25.864,32.623 25.864,34.762 25.864,42.186 25.548,42.502 24.423,42.502 23.65,43.275 R3.2
USB_D_P: R4.2 U1.14 | length 15.8
  Bottom Layer w0.381: R4.2 28.75,43.175 27.985,42.409 26.718,42.409 26.495,42.186 26.495,35.024 26.495,32.623 26.718,32.4 U1.14
USB_RTS: U1.21 U3.8 | length 16.5
  Top Layer w0.254: v1(19.558,34.798) 19.558,34.691 19.155,34.288 19.155,26.652 19.847,25.96 22.1,25.96 22.492,26.352 U3.8
  Bottom Layer w0.254: v1(19.558,34.798) 21.06,36.3 U1.21
USB_RX: TP1.1 U1.4 U3.14 | length 37.7
  Top Layer w0.254: v1(22.087,22.447) 22.095,22.447 22.1,22.452 U3.14
  Bottom Layer w0.254: TP1.1 23.876,14.732 23.876,15.974 22.087,17.763 v1(22.087,22.447) 20.83,23.704 20.83,29.121 22.031,30.322 29.107,30.322 31.975,33.19 31.975,38.751 31.826,38.9 U1.4
USB_TX: TP2.1 U1.23 U3.15 | length 46
  Top Layer w0.254: v1(20.447,21.59) 20.49,21.546 24,21.546 24.002,21.544 U3.15
  Bottom Layer w0.254: U1.23 16.429,37.6 15.027,36.199 15.027,34.821 17.653,32.195 17.653,25.152 20.447,22.359 v1(20.447,21.59) 20.447,16.943 20.341,16.838 20.341,12.298 23.622,9.017 TP2.1
VBUS: FB1.1 J1.1 R1.1 | length 14.4
  Bottom Layer w0.5: J1.1 25.375,47.3 25.993,47.918 31.819,47.918 32.112,47.625 ; 32.112,47.6 34.29,47.6 ; R1.1 34.251,47.561 34.29,47.6 ; FB1.1@35.73,47.6 34.29,47.6
Xbee_RX: TP3.1 U3.21 X1.2 | length 46.9
  Top Layer w0.254: U3.21 27.902,20.866 28.956,19.812 v1(35.433,19.812)
  Bottom Layer w0.254: v1(35.433,19.812) 52.093,19.812 X1.2 57.15,14.65 52.2,9.7 52.2,6.244 54.359,4.085 TP3.1
Xbee_TX: TP4.1 U3.23 X1.3 | length 43.8
  Top Layer w0.254: U3.23@29.125,23.1 30.319,21.906 34.609,21.906 v1(38.1,18.415)
  Bottom Layer w0.254: v1(38.1,18.415) 51.49,18.415 X1.3 48.5,8.105 TP4.1
pads on no net: J1. J1.4 MP1.1 MP2.1 MP3.1 MP4.1 S1.2 S1.3 S2.2 S2.3 U1.2 U1.3 U1.6 U1.9 U1.10 U1.11 U1.12 U1.17 U1.18 U1.19 U1.20 U1.25 U1.26 U1.27 U2.1 U2.6 U2.8 U2.9 U2.16 U3.3 U3.4 U3.9 U3.11 U3.18 X1.4 X1.6 X1.7 X1.8 X1.9 X1.11 X1.12 X1.13 X1.14 X1.15 X1.17 X1.19 X1.20

## Polygon pours and split planes (outlines as drawn)
GND on Bottom Layer "NONET_L02_P001" (solid, remove dead copper, shelved, pour order 1): 59.69,51.5 59.69,0 8,0 8,8 0,8 0,43.5 8,43.5 8,51.5
GND on Top Layer "NONET_L01_P000" (solid, remove dead copper, shelved, pour order 0): 8,8 8,0 59.69,0 59.69,51.5 8,51.5 8,43.5 0,43.5 0,8

## Silkscreen, mask and mechanical layers (free items; w line width, h text height)
Top Overlay:
  drawing of 12 lines, arcs and shapes, not listed
  text "LED_Ques" at 21.082,40.513 h1.52
  text "Btn_demande" at 5.207,33.274 h1.52 r270
  text "18112C_Ticketing_Slave" at 43.332,31.536 h1.52
  text "LED_Send" at 41.021,25.273 h1.52
  text "LED_Lost" at 40.7,9.7 h1.52
  text "LED_alim" at 57.404,5.402 h1.52
  text "Reset" at 16.764,4.826 h1.52
Bottom Overlay:
  text "5V" at 59.546,49.054 h1.52
  text "3V3" at 60.446,43.354 h1.52
  text "GND" at 9.646,38.631 h1.52
  text "USB_RX" at 27.94,16.764 h1.52
  text "18112C_Ticketing_Slave" at 2.921,10.033 h1.52 r270
  text "USB_TX" at 27.94,2.159 h1.52
  text "Xbee_RX" at 51.008,1.854 h1.52 r270
  text "Xbee_TX" at 45.408,1.654 h1.52 r270
  text "GND" at 60.154,1.154 h1.52 r270
Board Outline (ES):
  the board outline again, w0.254

## Dimensions
80.7,8 to 72.7,0 on Board
80.7,43.5 to 80.7,8 on Board
72.7,51.5 to 72.7,0 on Board
0,43.5 to 8,43.5 on Board
8,51.5 to 72.7,51.5 on Board
0,43.5 to 80.7,43.5 on Board

## Text inside footprints (layer, text, board x,y; h text height)
D2: Top Overlay "K" at 39.458,40.365 h0.76; Components Courtyards "K" at 39.458,40.365 h0.76
D3: Top Overlay "K" at 39.458,25.365 h0.76; Components Courtyards "K" at 39.458,25.365 h0.76
D4: Top Overlay "K" at 39.458,10.365 h0.76; Components Courtyards "K" at 39.458,10.365 h0.76
J1: Components Courtyards "PCB Edge" at 24.775,51.2 h1 r180
J2: Bottom Overlay "5" at 42.861,4.572 h1; Bottom Overlay "1" at 32.308,4.445 h1